# Allegro board PCB_backup.brd
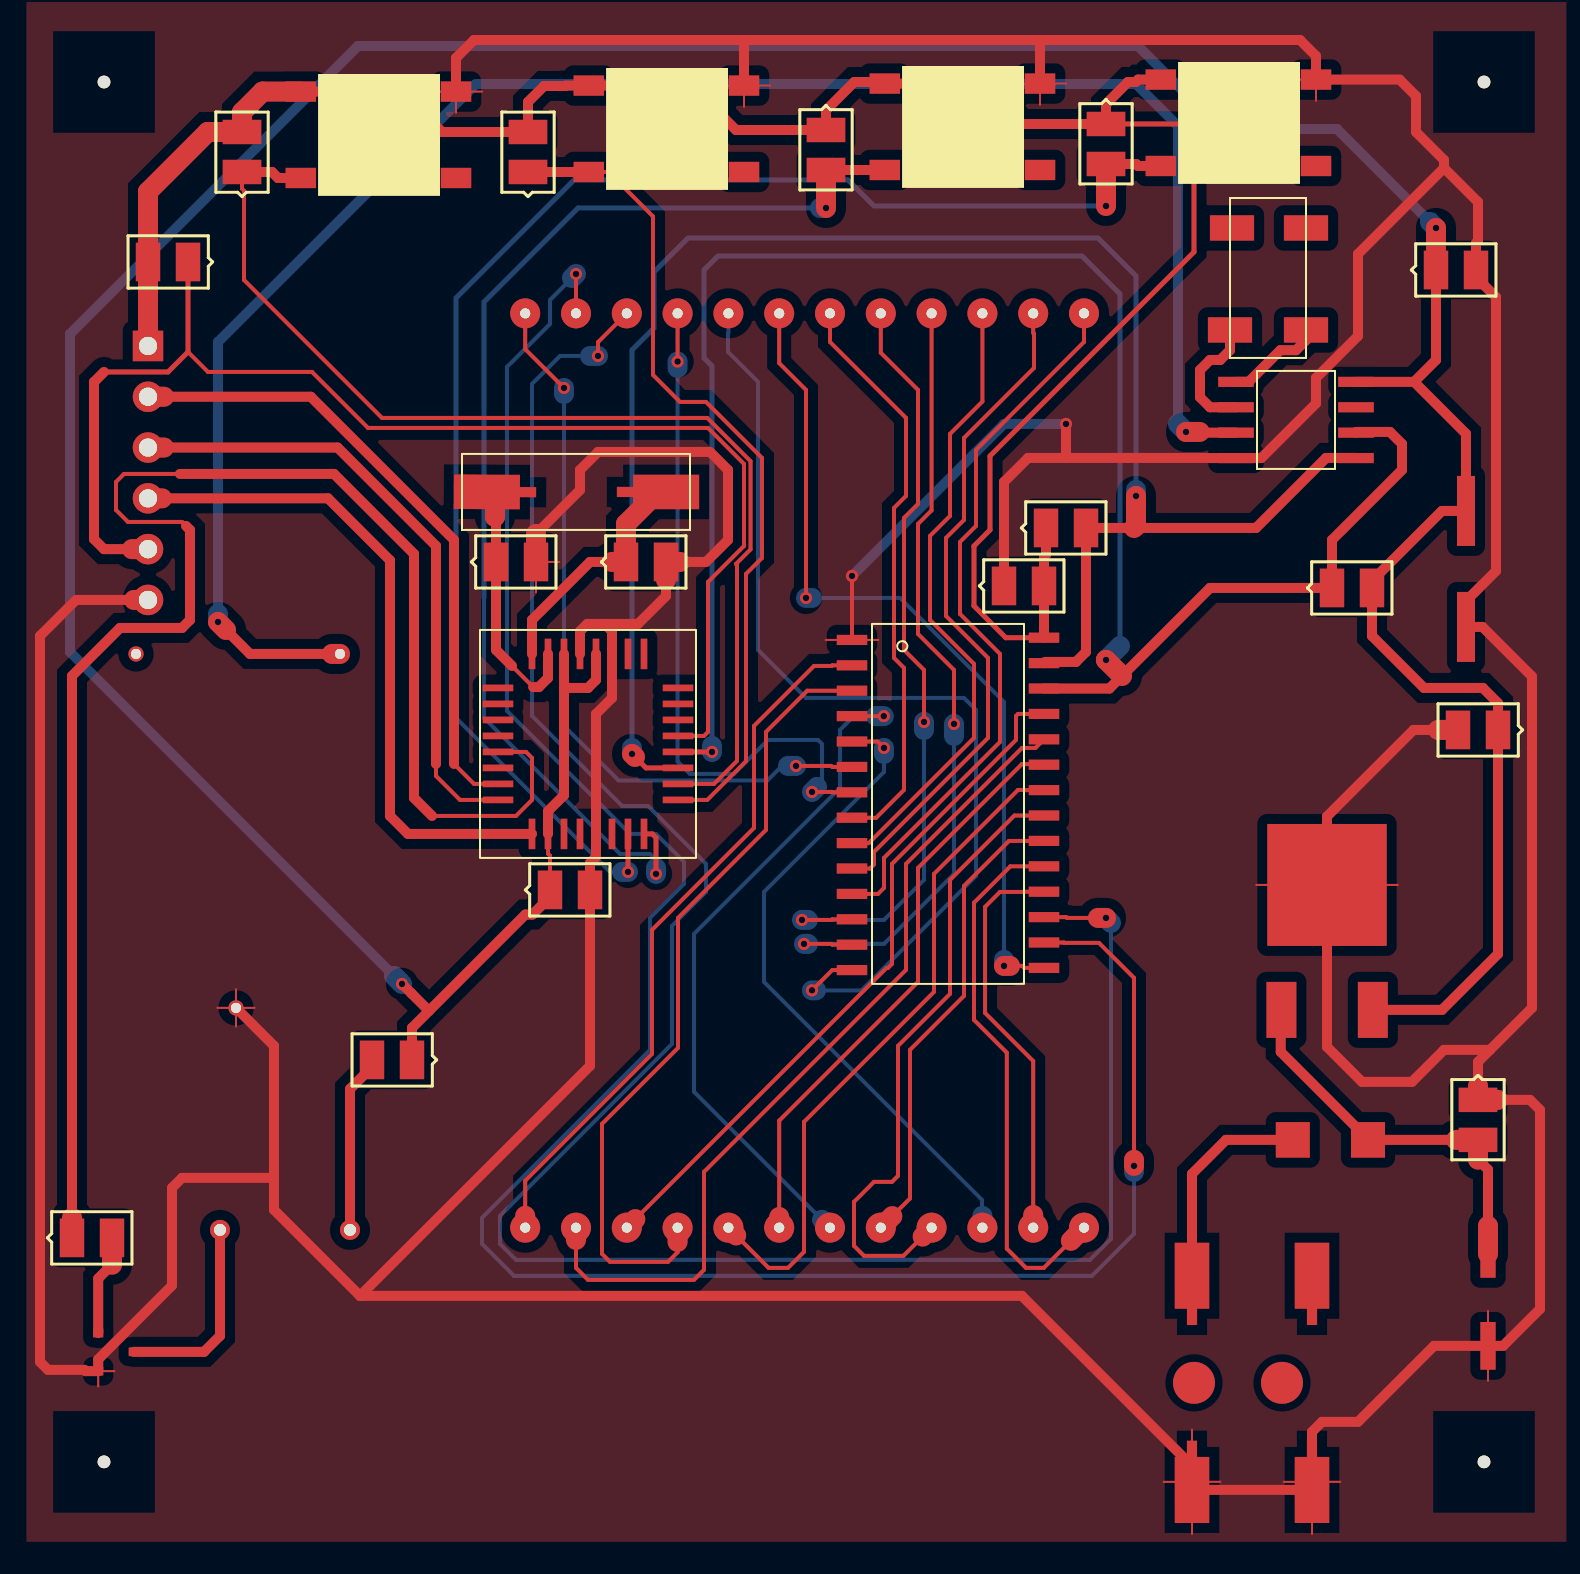
[diagram p0: board, top side]
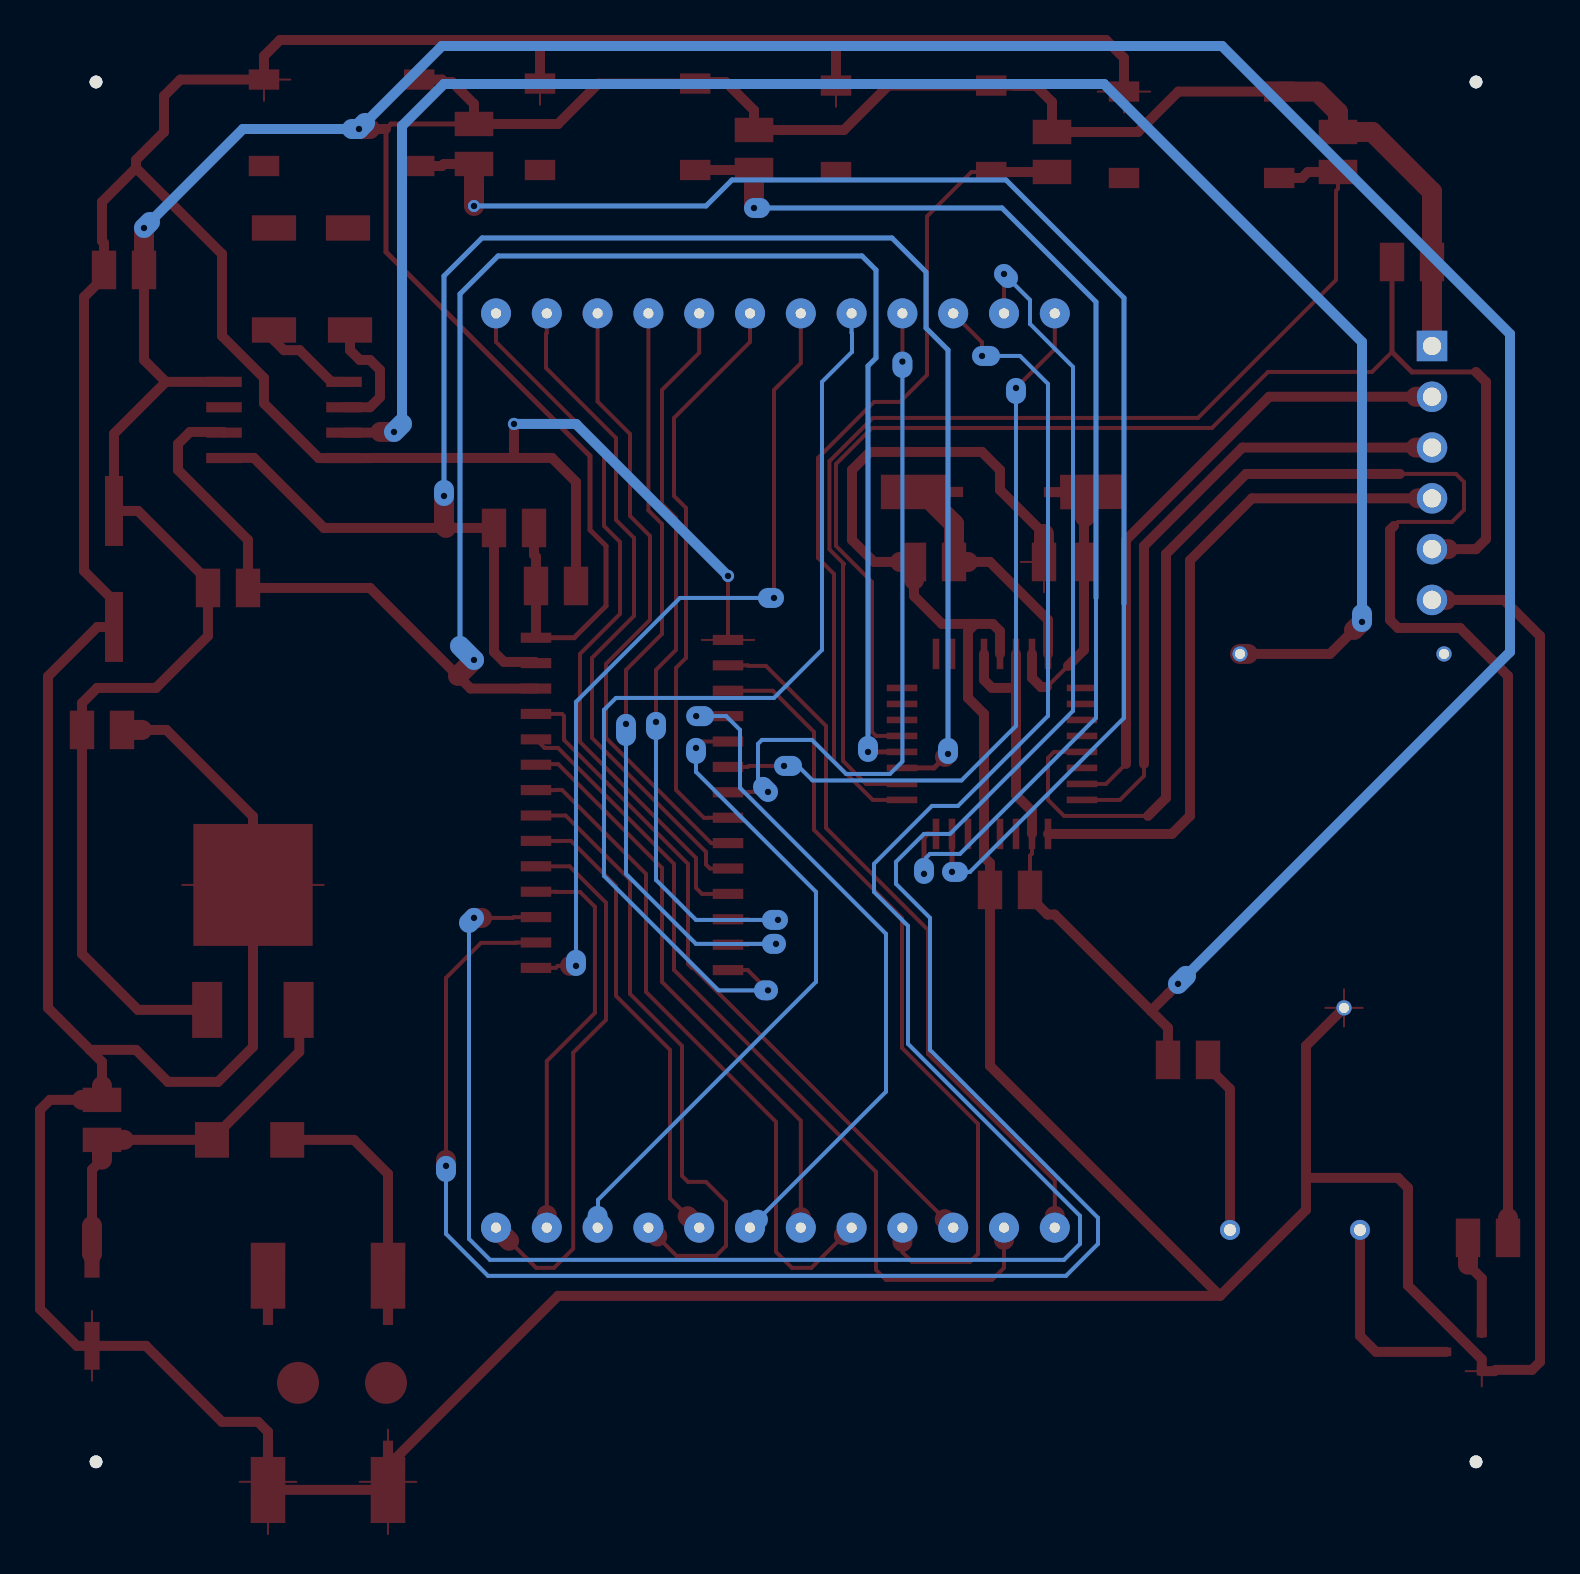
[diagram p1: board, bottom side, seen from below]

No outline. copper layers: TOP, BOTTOM. Coordinates in mm from the lowest, leftmost part position.

## Design rules (mm)
constraint set DEFAULT: min track width 0.1

## Placement (name value [footprint] x y rotation side)
BT1  Battery  [BATCR2032VTM]  8.2 30.3 270 top
C1  100n  [SMD0805]  46.6 43.8 0 top
C2  100n  [SMD0805]  68.2 59.6 0 top
C3  100n  [SMD0805]  70.3 18.1 270 top
C4  100n  [SMD0805]  71.3 36.6 180 top
C5  100n  [SMD0805]  23.9 28.6 0 top
C6  22p  [SMD0805]  27.7 45 0 top
C7  22p  [SMD0805]  21.2 45 0 top
C8  100u  [CE100-16SMD]  70.8 8 0 top
C9  220u  [UWT0J221MCL6GS]  69.7 44.6 0 top
D1  -  [TBA23-12SURKCGKWA]  50.6 7.9 180 bottom
D2  S1M  [DO214AC]  63 16.1 180 top
J1  CON6  [JUMPER6]  3.8 49.4 270 top
J2  PC-GK2.1/SMD  [PCGK21SMD]  59.9 6 0 top
LS1  -  [LD-BZEN-1205]  10.3 11.6 270 top
MODE  TACTM-67N-F-1  [TACT67N]  18.4 69.4 180 top
NOREF  -  [unnamed]  70.6 69 0 top
NOREF#2  -  [unnamed]  1.6 0 0 top
NOREF#3  -  [unnamed]  1.6 69 0 top
NOREF#4  -  [unnamed]  70.6 0 0 top
Q1  BC817-40L  [SOT23]  2.2 5.5 0 top
R1  4k7  [SMD0805]  0 11.2 0 top
R2  4k7  [SMD0805]  51.7 66.9 270 top
R3  4k7  [SMD0805]  22.8 64.5 90 top
R4  4k7  [SMD0805]  8.5 64.5 90 top
R5  4k7  [SMD0805]  37.7 66.6 270 top
R6  4k7  [SMD0805]  5.8 60 180 top
R7  4k7  [SMD0805]  63 43.7 0 top
R8  4k7  [SMD0805]  48.7 46.7 0 top
R9  100R  [SMD0805]  17 20.1 180 top
SET  TACTM-67N-F-2  [TACT67N]  32.8 69.7 180 top
U1  HT16K33-28SOP  [SOP28]  43.8 29.1 0 top
U2  ATmega8-TQ32  [TQFP32]  25.8 35.9 270 top
U3  DS1307  [SO8]  61.2 52.1 0 top
U4  L78M05ACDT  [DPAK]  62.8 29.1 0 top
UNK+  TACTM-67N-F-3  [TACT67N]  47.6 69.8 180 top
UNK-  TACTM-67N-F-4  [TACT67N]  61.4 70 180 top
Y1  12.00M-SMDHC49S  [SMDHC49S]  25.2 48.5 0 top
Y2  ABS25-32.768KHZ  [ABS25KRYSTAL]  59.8 59.2 180 top

## Library data of the parts
BT1 = Battery_4
C1-C7 = CAP NP
C8 C9 = CAP POL
D1 = TBA23-12SURKCGKWA_1
D2 = DIODE
J1 = CON6_0
J2 = PC-GK2_1.1/SMD
LS1 = LD-BZEN-1205_0
MODE SET UNK+ UNK- = TACTM-67N-F_2
Q1 = BC817-40L_0
R1-R9 = R
U1 = HT16K33-28SOP_2
U2 = ATmega8-TQ32_5
U3 = DS1307_1
U4 = L78M05ACDT_1
Y1 = 492S/SM_2
Y2 = ABS25-32_0.768KHZ

## Footprints (pads in the part's own frame, mm; a bottom-side part is the same pattern mirrored in y, then rotated)
ABS25KRYSTAL
  rect 2.21x1.27 smd: 1(-1.9,2.6) 2(-1.9,-2.5) 3(1.8,-2.5) 4(1.9,2.6)
BATCR2032VTM
  round 0.762 hole 0.508: 1(-10.1,5.2) 2(-10.1,-5) 3(7.6,0)
CE100-16SMD
  rect 0.762x2.388 smd: 1(0,2.4) 2(0,-2.2)
DO214AC
  rect 1.702x1.778 smd: 1(-1.8,0) 2(1.96,0)
DPAK
  rect 1.5x2.8 smd: 1(-2.33,-6.5) 2(2.242,-6.5)
  rect 5.969x6.096 smd: 3(-0.05,-0.25)
JUMPER6
  rect 1.524x1.524 hole 0.914: 1(-6.4,0)
  round 1.524 hole 0.914: 2(-3.86,0) 3(-1.32,0) 4(1.22,0) 5(3.76,0) 6(6.3,0)
LD-BZEN-1205
  round 1 hole 0.6: 1(0,3.6) 2(0,-2.9)
PCGK21SMD
  round 2.1 smd: (-3.8,-2.05) (0.6,-2.05)
  custom 1.727x4.115 smd: 1(-3.9,2.9) 2(2.1,2.9) 3(-3.9,-7) 4(2.1,-7)
SMD0805
  rect 1.219x1.93 smd: 1(0,0) 2(2,0)
SMDHC49S
  custom 4.115x1.727 smd: 1(4.1,0)
  custom 4.115x1.727 smd rot 179.6: 2(-4.05,0)
SO8
  rect 1.778x0.508 smd: 1(-3,1.905) 2(-3,0.635) 3(-3,-0.635) 4(-3,-1.905) 5(3,-1.905) 6(3,-0.635) 7(3,0.635) 8(3,1.905)
SOP28
  rect 1.524x0.508 smd: 1(-4.8,12) 2(-4.8,10.73) 3(-4.8,9.46) 4(-4.8,8.19) 5(-4.8,6.92) 6(-4.8,5.65) 7(-4.8,4.38) 8(-4.8,3.11) 9(-4.8,1.84) 10(-4.8,0.57) 11(-4.8,-0.7) 12(-4.8,-1.97) 13(-4.8,-3.24) 14(-4.8,-4.51) 15(4.8,-4.4) 16(4.8,-3.13) 17(4.8,-1.86) 18(4.8,-0.59) 19(4.8,0.68) 20(4.8,1.95) 21(4.8,3.22) 22(4.8,4.49) 23(4.8,5.76) 24(4.8,7.03) 25(4.8,8.3) 26(4.8,9.57) 27(4.8,10.84) 28(4.8,12.11)
SOT23
  rect 0.508x0.432 smd: 1(-0.889,0.94) 2(-0.889,-0.965) 3(0.889,0)
TACT67N
  rect 1.524x1.016 smd: 1(6.96,5.2) 2(6.96,0.88) 3(-0.8,5.2) 4(-0.8,0.88)
TBA23-12SURKCGKWA
  round 1.5 hole 0.508: 1(0,3.81) 2(2.54,3.81) 3(5.08,3.81) 4(7.62,3.81) 5(10.16,3.81) 6(12.7,3.81) 7(15.24,3.81) 8(17.78,3.81) 9(20.32,3.81) 10(22.86,3.81) 11(25.4,3.81) 12(27.94,3.81) 13(27.94,49.53) 14(25.4,49.53) 15(22.86,49.53) 16(20.32,49.53) 17(17.78,49.53) 18(15.24,49.53) 19(12.7,49.53) 20(10.16,49.53) 21(7.62,49.53) 22(5.08,49.53) 23(2.54,49.53) 24(0,49.53)
TQFP32
  rect 1.524x0.33 smd: 1(-4.5,2.8) 2(-4.5,2) 3(-4.5,1.2) 4(-4.5,0.4) 5(-4.5,-0.4) 6(-4.5,-1.2) 7(-4.5,-2) 8(-4.5,-2.8) 17(4.5,-2.8) 18(4.5,-2) 19(4.5,-1.2) 20(4.5,-0.4) 21(4.5,0.4) 22(4.5,1.2) 23(4.5,2) 24(4.5,2.8)
  rect 0.33x1.524 smd: 9(-2.8,-4.5) 10(-2,-4.5) 11(-1.2,-4.5) 12(-0.4,-4.5) 13(0.4,-4.5) 14(1.2,-4.5) 15(2,-4.5) 16(2.8,-4.5) 25(2.8,4.5) 26(2,4.5) 27(1.2,4.5) 28(0.4,4.5) 29(-0.4,4.5) 30(-1.2,4.5) 31(-2,4.5) 32(-2.8,4.5)
unnamed
  round 0.635 hole 3.175 unplated: (0,0)
UWT0J221MCL6GS
  rect 0.9x3.5 smd: 1(0,2.95) 2(0,-2.85)

## Nets
GND_SIGNAL: BT1.3(-) C1.1 C2.2 C3.1 C4.2 C5.2 C6.2 C7.2 C8.2 C9.2 J1.6 J2.3 J2.4 MODE.4 Q1.2(EMITTER) SET.4 U1.1(VSS) U2.3 U2.5 U2.21 U3.4 U4.3 UNK+.4 UNK-.4
+: BT1.2
N02068: J1.2 U2.15
N02083: J1.4 U2.17
N02208: D1.5 U1.20
N02210: D1.15 U1.17
N02212: D1.4 U1.21
N02214: D1.2 U1.18
N02216: D1.8 U1.22
N02218: D1.18 U1.15
N02220: D1.1 U1.19
N02222: D1.7 U1.23
N02224: D1.14 U1.16
N02226: D1.11 U1.24
N02228: D1.10 U1.25
N02362: D1.17 U1.14
N02378: D1.21 U1.13
N02401: D1.20 U1.12
N02499: D1.24 U1.11
N02611: D1.23 U1.10
N03217: D1.22 U1.9
N03241: D1.19 U1.8
N03266: D1.16 U1.7
N03291: D1.13 U1.6
N03316: D1.3 U1.5
N03341: D1.6 U1.4
N03367: D1.9 U1.3
N03392: D1.12 U1.2
N04189: R8.2 U1.27 U2.27 U3.5
N04289: R7.1 U1.26 U2.28 U3.6
N04939: BT1.1 U3.3
N06025: C1.2 C2.1 C4.1 C5.1 C9.1 J1.1 MODE.2 R2.1 R3.2 R4.2 R5.1 R6.2 R7.2 R8.1 R9.1 SET.2 U1.28 U2.4 U2.6(VCC#6) U2.18 U3.8 U4.2(OUTPUT) UNK+.2 UNK-.2
N06344: C3.2 C8.1 D2.1(K) U4.1
N08059: R2.2 U2.23 UNK-.1
N08379: R5.2 U2.24 UNK+.1
N010431: LS1.1 R9.2
N10447: C6.1 U2.8 Y1.1
N10454: C7.1 U2.7 Y1.2(OUT)
N11300: J1.5 R6.1 U2.29
N14311: D2.2 J2.1
N24135: R3.1 SET.1 U2.25
N24605: MODE.1 R4.1 U2.26
N28869: R1.1 U2.13
N29351: J1.3 U2.16
N31755: Q1.1 R1.2
N44408: U3.1 Y2.1
N44420: U3.2(X2) Y2.4
N057671: LS1.2(-) Q1.3

Pads without a net: J2 2; MODE 3; SET 3; U2 1 2 9 10 11 12 14 19 20 22 30 31 32; U3 7; UNK+ 3; UNK- 3; Y2 2 3

## Via types
v1: diameter 0.61, hole 0.33, TOP to BOTTOM, 32 vias

## Routing (per net, layer and track width the routed paths; a pad name or vN(x,y) marks a point on that pad's centre or on a via; arc(x,y) is an arc through that point)
GND_SIGNAL: length 476.2
  TOP w0.1: 40.31,41.1 U1.1 37.69,41.1 ; J2.3 57.41,-1 ; J2.3 56,-3.61 ; J2.3 54.59,-1 ; J2.3 56,1.61 ; 24.36,45 C7.2 23.2,43.48 ; UNK+.4 49.71,68.92 ; UNK+.4 48.4,67.86 ; UNK+.4 47.09,68.92 ; 33.6,67.76 SET.4 ; SET.4 34.91,68.82 ; SET.4 32.29,68.82 ; 62,1.61 J2.4 ; J2.4 60.59,-1 ; J2.4 63.41,-1 ; J2.4 62,-3.61 ; BT1.3 8.2,23.63 ; BT1.3 7.27,22.7 ; BT1.3 9.13,22.7 ; BT1.3 8.2,21.77 ; 66.29,28.85 U4.3 59.21,28.85 ; 70.8,7.55 C8.2 70.8,4.06 ; MODE.4 20.51,68.52 ; MODE.4 19.2,67.46 ; MODE.4 17.89,68.52 ; 60.89,69.12 UNK-.4 62.2,68.06 ; 2.12,4.53 Q1.2 1.31,3.77
  TOP w0.2: U1.1 v1(39,44.3)
  TOP w0.5: 68.3,36.6 67.07,36.6 62.75,32.28 U4.3 62.75,20.75 64.5,19 67,19 68.6,20.6 70.9,20.6 ; 14.4,8.3 25.9,19.8 C5.2 25.9,29.94 26.2,30.24 U2.21 26.2,37.4 27,38.2 U2.3 27,41.54 26.64,41.9 ; 14.4,8.3 47.49,8.3 56,-0.21 J2.3 56,-1.4 62,-1.4 J2.4 62,1.5 62.5,2 64.3,2 68.1,5.8 C8.2 71.56,5.8 73.4,7.64 73.4,17.6 72.9,18.1 71.3,18.1 ; 14.4,8.3 10.1,12.6 10.1,14.3 ; 49.7,50.2 47.8,50.2 46.6,49 C1.1 ; 49.7,50.2 v1(49.7,51.9) ; 49.7,50.2 56.81,50.2 56.81,50.19 U3.4 59.47,50.19 62.2,52.93 62.2,54.2 64.3,56.3 64.3,60.4 68.6,64.7 ; SET.4 33.6,71 33.5,71.1 ; BT1.3 10.1,20.8 10.1,14.3 ; 33.5,71.1 20.1,71.1 19.2,70.2 MODE.4 ; 33.5,71.1 48.43,71.1 ; 10.1,14.3 10,14.2 5.5,14.2 5,13.7 5,8.82 1.31,5.13 Q1.2 0.68,4.53 0.61,4.6 -1.2,4.6 -1.6,5 -1.6,41.3 0.2,43.1 3.1,43.1 ; 70.9,20.6 70.3,20 70.3,18.8 ; 70.9,20.6 73,22.7 73,39.28 70.53,41.75 C9.2 69.7,43.05 71.2,44.55 71.2,58.24 70.2,59.24 C2.2 70.2,60.94 70.3,61.04 70.3,63 68.6,64.7 ; UNK+.4 48.4,71.07 48.43,71.1 ; 26.64,41.9 25.76,41.9 25.4,41.54 U2.5 ; 26.64,41.9 28.3,41.9 29.7,43.3 29.7,44.1 ; 68.6,64.7 68.6,65.1 67.2,66.5 67.2,68.3 66.38,69.12 UNK-.4 62.2,70.3 61.4,71.1 48.43,71.1 ; 23.2,46.4 25.4,48.6 25.4,49.6 26.3,50.5 31.9,50.5 32.8,49.6 32.8,46.1 31.7,45 30.4,45
  TOP w1: 29.7,44.1 C6.2 30.4,45 ; 68.3,36.6 C4.2 ; 70.3,18.8 C3.1 71.3,18.1 ; 23.2,46.4 C7.2 ; 3.1,43.1 J1.6
  BOTTOM w0.5: v1(49.7,51.9) 46.6,51.9 v1(39,44.3)
N02068: length 32.1
  TOP w0.2: 19.1,34.9 20.1,33.9 U2.15
  TOP w0.5: 19.1,34.9 19.1,46.1 11.94,53.26 4.6,53.26
  TOP w1: J1.2 4.6,53.26
N02083: length 33.6
  TOP w0.5: U2.17 16.8,31.4 15.9,32.3 15.9,45.08 12.8,48.18 4.5,48.18
  TOP w1: J1.4 4.5,48.18
N02208: length 23.7
  TOP w0.2: 41.01,12.28 41.9,13.17 41.9,20.6 44.6,23.3 44.6,28.8 46.85,31.05 U1.20
  TOP w1: D1.5 41.01,12.28
N02210: length 108.8
  TOP w0.2: 51.3,27.2 49.75,27.2 49.71,27.24 U1.17 ; D1.15 26.3,55.99 v1(26.3,55.3)
  TOP w1: v1(51.7,27.2) 51.3,27.2
  BOTTOM w0.2: 25.9,55.3 24.4,55.3 23,53.9 23,37.3 27.5,32.8 28.8,32.8 31.7,29.9 31.7,28.5 30,26.8 30,20.9 21.4,12.3 21.4,10.9 22.2,10.1 50.9,10.1 51.95,11.15 51.95,26.95
  BOTTOM w1: v1(51.7,27.2) 51.95,26.95 ; 25.9,55.3 v1(26.3,55.3)
N02212: length 31.5
  TOP w0.2: 42.54,11.27 41.57,10.3 39.6,10.3 39.1,10.8 39.1,13 40.1,14 41,14 41.3,14.3 41.3,20.8 43.9,23.4 43.9,29.1 47.12,32.32 U1.21
  TOP w1: D1.4 42.54,11.27
N02214: length 20.3
  TOP w0.2: U1.18 47.61,28.51 47.6,28.5 46.4,28.5 45.65,27.75 45.65,22.45 48.06,20.04 48.06,12.34
  TOP w1: D1.2 48.06,12.34
N02216: length 33.8
  TOP w0.2: 33.21,11.32 34.83,9.7 35.8,9.7 36.6,10.5 36.6,17 43.1,23.5 43.1,29.4 47.3,33.6 47.6,33.6 47.61,33.59 U1.22
  TOP w1: D1.8 33.21,11.32
N02218: length 42.1
  TOP w0.2: U1.15 47.61,24.7 47.51,24.8 46.9,24.8 ; v1(36.7,43.2) 36.7,53.6 35.36,54.94 D1.18
  TOP w1: v1(46.6,24.8) 46.9,24.8
  BOTTOM w0.2: 37,43.2 41.4,43.2 46.6,38 46.6,25.1
  BOTTOM w1: v1(46.6,24.8) 46.6,25.1 ; 37,43.2 v1(36.7,43.2)
N02220: length 27.3
  TOP w0.2: 49.94,11.06 48.59,9.7 47.7,9.7 46.74,10.66 46.74,20.46 45.1,22.1 45.1,27.96 46.92,29.78 U1.19
  TOP w1: D1.1 49.94,11.06
N02222: length 29.3
  TOP w0.2: U1.23 48.57,34.89 47.49,34.89 42.3,29.7 42.3,24 35.36,17.06 35.36,12.24
  TOP w1: D1.7 35.36,12.24
N02224: length 112.7
  TOP w0.2: U1.16 49.59,25.97 49.61,25.95 51.35,25.95 53.1,24.2 53.1,15.1 ; D1.14 v1(25.2,59.4)
  TOP w1: v1(53.1,14.8) 53.1,15.1
  BOTTOM w0.2: 53.1,14.5 53.1,11.4 51,9.3 22.1,9.3 20.5,10.9 20.5,12.2 28.9,20.6 28.9,27.2 30.6,28.9 30.6,30 29.2,31.4 27.9,31.4 21.75,37.55 21.75,54.75 23.9,56.9 23.9,58.1 25,59.2
  BOTTOM w1: 25,59.2 v1(25.2,59.4) ; v1(53.1,14.8) 53.1,14.5
N02226: length 43.3
  TOP w0.2: 25.2,11.1 25.2,9.7 25.8,9.1 31.1,9.1 31.6,9.6 31.6,14.5 41.7,24.6 41.7,29.9 47.5,35.7 48.17,35.7 U1.24 48.09,36.13
  TOP w1: D1.11 25.2,11.1
N02228: length 35.1
  TOP w0.2: 28.16,12.13 40.73,24.7 40.8,24.7 41,24.9 41,29.9 47.2,36.1 47.2,37.3 47.3,37.4 U1.25
  TOP w1: D1.10 28.16,12.13
N02362: length 50.9
  TOP w0.2: U1.14 38.01,24.59 v1(37,23.58)
  BOTTOM w0.2: D1.17 32.82,56.45 32.8,56.43 32.8,55.5 34.3,54 34.3,40.6 36.7,38.2 44.6,38.2 45.2,37.6 45.2,29.3 39.48,23.58 37.2,23.58
  BOTTOM w1: v1(37,23.58) 37.2,23.58
N02378: length 40.4
  TOP w0.2: v1(44.1,36.9) 44.1,39.6 42.3,41.4 42.3,46.9 42.98,47.58 D1.21 ; v1(36.6,25.9) 37.97,25.9 38.01,25.86 U1.13
  BOTTOM w0.2: 36.8,25.9 40.6,25.9 44.1,29.4 44.1,36.3
  BOTTOM w1: v1(44.1,36.9) 44.1,36.3 ; 36.8,25.9 v1(36.6,25.9)
N02401: length 39.2
  TOP w0.2: v1(42.6,37) 42.6,39.6 41.6,40.6 41.6,47.2 42.3,47.9 42.3,53.6 40.44,55.46 D1.20 ; U1.12 38.01,27.13 37.98,27.1 v1(36.5,27.1)
  BOTTOM w0.2: 36.8,27.1 40.6,27.1 42.6,29.1 42.6,36.6
  BOTTOM w1: v1(42.6,37) 42.6,36.6 ; 36.8,27.1 v1(36.5,27.1)
N02499: length 36.3
  TOP w0.2: D1.24 50.6,56 45.2,50.6 45.2,46.8 44.4,46 44.4,42.4 46.4,40.4 46.4,36 40.6,30.2 40.6,28.7 40.3,28.4 U1.11
N02611: length 33.8
  TOP w0.2: D1.23 48.06,56.45 48.1,56.41 48.1,54.7 44.6,51.2 44.6,47.1 43.7,46.2 43.7,42.3 45.8,40.2 45.8,36.2 40.1,30.5 40.1,29.87 39.9,29.67 U1.10
N03217: length 31.5
  TOP w0.2: D1.22 45.52,53.02 43.9,51.4 43.9,47.3 42.9,46.3 42.9,42.1 45.1,39.9 45.1,36.2 39.84,30.94 U1.9
N03241: length 29
  TOP w0.2: U1.8 39.99,32.21 40,32.2 40.2,32.2 41.6,33.6 41.6,39.7 41.1,40.2 41.1,47.7 41.7,48.3 41.7,52.2 37.9,56 D1.19
N03266: length 35.3
  TOP w0.2: D1.16 v1(30.28,55.02) ; U1.7 38.01,33.48 37.99,33.5 v1(37,33.5)
  BOTTOM w0.2: 37.25,33.75 37.5,34 37.5,35.9 37.3,36.1 34.8,36.1 33.1,34.4 30.9,34.4 30.28,35.02 30.28,54.7
  BOTTOM w1: v1(37,33.5) 37.25,33.75 ; 30.28,54.7 v1(30.28,55.02)
N03291: length 37.3
  TOP w0.2: U1.6 38.01,34.75 37.96,34.8 v1(36.2,34.8) ; D1.13 22.66,55.64 v1(24.6,53.7)
  BOTTOM w0.2: 35.8,34.8 35.5,34.8 34.77,34.07 27.33,34.07 24.6,36.8 24.6,53.4
  BOTTOM w1: 24.6,53.4 v1(24.6,53.7) ; v1(36.2,34.8) 35.8,34.8
N03316: length 32.7
  TOP w0.2: v1(40.6,35.7) 40.28,36.02 U1.5
  BOTTOM w0.2: 45.52,12.3 45.52,12.69 45.5,12.71 45.5,13.1 34.6,24 34.6,28.5 40.6,34.5 40.6,35.4
  BOTTOM w1: 45.52,12.3 D1.3 ; v1(40.6,35.7) 40.6,35.4
N03341: length 34.8
  TOP w0.2: U1.4 v1(40.59,37.29)
  BOTTOM w0.2: 37.5,12.11 31.1,18.51 31.1,26.4 38.4,33.7 38.4,36.6 39.09,37.29 40.2,37.29
  BOTTOM w1: 37.5,12.11 D1.6 ; v1(40.59,37.29) 40.2,37.29
N03367: length 40
  TOP w0.2: 30.28,11 30.28,10.48 29.8,10 26.9,10 26.5,10.4 26.5,16.9 30.3,20.7 30.3,27.2 34.7,31.6 34.7,36.5 36.76,38.56 U1.3
  TOP w1: D1.9 30.28,11
N03392: length 36
  TOP w0.2: U1.2 38.01,39.83 37.98,39.8 37.1,39.8 34.1,36.8 34.1,31.7 29,26.6 29,20.4 22.66,14.06 22.66,12.3
  TOP w1: D1.12 22.66,12.3
N04189: length 88.9
  TOP w0.25: U2.27 28.7,34.7 28.15,35.25
  TOP w0.5: U3.5 64.19,50.2 62.7,50.2 59.2,46.7 R8.2 50.7,40.5 50.2,40 48.66,40 U1.27
  TOP w1: 53.1,46.7 53.2,46.8 v1(53.2,48.3) ; v1(28,35.4) 28.15,35.25
  BOTTOM w0.25: 53.2,48.6 53.2,59.3 51.3,61.2 30.8,61.2 29.1,59.5 29.1,56.7 28,55.6 28,35.7
  BOTTOM w1: v1(53.2,48.3) 53.2,48.6 ; 28,35.7 v1(28,35.4)
N04289: length 95.3
  TOP w0.25: U2.28 v1(32,35.5)
  TOP w0.5: U1.26 51.87,38.67 56.9,43.7 R7.1 63,46.1 66.5,49.6 66.5,50.9 65.9,51.5 64.23,51.5 U3.6
  TOP w1: v1(51.7,40.1) 52.5,39.3
  BOTTOM w0.25: 52.4,40.8 52.4,58.4 50.5,60.3 32.3,60.3 31.6,59.6 31.6,55.2 32,54.8 32,35.8
  BOTTOM w1: 52.4,40.8 v1(51.7,40.1) ; v1(32,35.5) 32,35.8
N04939: length 93
  TOP w0.5: 56.38,51.5 56.42,51.47 U3.3 ; 7.7,41.6 8.9,40.4 13,40.4
  TOP w1: 7.7,41.6 v1(7.3,42) ; v1(55.7,51.5) 56.38,51.5 ; BT1.1 13,40.4
  BOTTOM w0.5: 7.3,42.4 7.3,56 20.2,68.9 53.2,68.9 55.3,66.8 55.3,51.9
  BOTTOM w1: 55.3,51.9 v1(55.7,51.5) ; v1(7.3,42) 7.3,42.4
N06025: length 313.8
  TOP w0.2: C5.1 23.9,30.31 23.8,30.41 U2.18
  TOP w0.25: U1.28 46.69,41.21 45.1,42.8 45.1,45.8 45.9,46.6 45.9,50.3 56.1,60.5 56.1,66.65 55.85,66.9 R2.1
  TOP w0.5: U2.6 24.6,38.7 ; 24.6,38.7 25.8,38.7 26.2,39.1 U2.4 ; 24.6,38.7 24.6,33.34 23.8,32.54 U2.18 ; MODE.2 16.48,68.52 18.5,66.5 R3.2 22.8,68 23.6,68.8 24.68,68.8 24.7,68.82 SET.2 30.98,68.82 33.2,66.6 R5.1 37.7,67.59 39.11,69 40.56,69 UNK+.2 45.48,68.92 47.5,66.9 R2.1 51.7,67.9 52.8,69 53.18,69 53.3,69.12 UNK-.2 ; v1(16.5,23.9) 16.98,23.42 17.85,22.55 ; U1.28 C1.2 48.6,45.26 48.7,45.36 R8.1 ; 17.85,22.55 17,21.7 R9.1 ; 17.85,22.55 22.67,27.37 23.02,27.37 23.9,28.24 C5.1 ; 56.9,66.65 56.1,66.65 ; C2.1 68.2,55.1 67.1,54 ; 67.1,54 U3.8 ; 67.1,54 69.7,51.41 C9.1 68.49,47.55 65,44.06 R7.2 65,41.3 67.6,38.7 70.54,38.7 71.3,37.94 C4.1 71.3,25.4 68.5,22.6 U4.2
  TOP w1: J1.1 R6.2 3.8,63.52 6.78,66.5 R4.2 8.5,67.49 9.53,68.52 MODE.2 ; v1(57.45,66.65) 56.9,66.65 ; v1(68.2,61.7) C2.1
  BOTTOM w0.5: 67.9,62 63.25,66.65 57.8,66.65 ; 16.1,24.3 -0.1,40.5 -0.1,56.4 14.3,70.8 53.3,70.8 57.15,66.95
  BOTTOM w1: v1(16.5,23.9) 16.1,24.3 ; 57.15,66.95 v1(57.45,66.65) 57.8,66.65 ; 67.9,62 v1(68.2,61.7)
N06344: length 19.7
  TOP w0.5: 70.3,15.11 70.8,14.61 70.8,11.8 ; U4.1 60.44,22.57 60.44,20.5 64.8,16.14 D2.1 69.2,16.1
  TOP w1: 70.3,15.11 C3.2 69.2,16.1 ; 70.8,11.8 C8.1
N08059: length 75.1
  TOP w0.25: v1(27.8,29.5) U2.23
  TOP w0.5: R2.2 53.2,64.9 53.3,64.8 UNK-.1
  TOP w1: v1(51.7,62.8) R2.2
  BOTTOM w0.2: 19.2,42.9 19.2,37.2 26.9,29.5 27.5,29.5
  BOTTOM w0.25: 19.2,42.9 19.2,58.2 25.1,64.1 38.8,64.1 40.1,62.8 v1(51.7,62.8)
  BOTTOM w1: v1(27.8,29.5) 27.5,29.5
N08379: length 59.4
  TOP w0.25: U2.24 29.02,31.4 29.2,31.22 v1(29.2,29.4)
  TOP w0.5: R5.2 UNK+.1
  TOP w1: v1(37.7,62.7) R5.2
  BOTTOM w0.2: 20.6,43.2 20.6,37.2 27.4,30.4 28.9,30.4 29.1,30.2 29.1,30.03 29.2,29.93 29.2,29.7
  BOTTOM w0.25: 20.6,43.2 20.6,58 25.3,62.7 37.4,62.7
  BOTTOM w1: v1(29.2,29.4) 29.2,29.7 ; 37.4,62.7 v1(37.7,62.7)
N010431: length 9
  TOP w0.5: R9.2 15,19.74 13.9,18.64 LS1.1
N10447: length 11.8
  TOP w0.5: U2.8 23,42.1 25.9,45 27,45
  TOP w1: Y1.1 27.7,46.9 C6.1 27,45
N10454: length 12.7
  TOP w0.2: 22,39.8 23.06,38.74
  TOP w0.5: 23.06,38.74 23.34,38.74 23.8,39.2 U2.7 ; 21.14,47.26 21.2,47.2 C7.1 21.2,40.6 22,39.8
  TOP w1: 21.14,47.26 21.15,47.27 Y1.2
N11300: length 66.4
  TOP w0.2: U2.29 31.6,36.3 31.8,36.5 31.8,44 33.6,45.8 33.6,49.9 31.8,51.7 14.8,51.7 12,54.5 6.8,54.5 5.8,55.5
  TOP w0.25: R6.1 5.8,55.5 4.8,54.5 1.6,54.5
  TOP w0.5: 1.6,54.5 1.1,54 1.1,46.14 1.6,45.64 3,45.64
  TOP w1: J1.5 3,45.64
N14311: length 11.2
  TOP w0.5: D2.2 57.7,16.1 56,14.4 J2.1
N24135: length 42
  TOP w0.2: U2.25 31.76,33.1 33.7,35.04 33.7,44.4 34.5,45.2 34.5,50.2 31.7,53 30.4,53 29.05,54.35 29.05,62.28 26.83,64.5 SET.1
  TOP w0.5: R3.1 SET.1
N24605: length 56.3
  TOP w0.2: R4.1 8.5,63.66 8.6,63.56 8.6,59.1 15.5,52.2 31.76,52.2 33.93,50.04 33.93,45.63 33.2,44.9 33.25,44.85 33.25,35.05 32.1,33.9 U2.26
  TOP w0.5: R4.1 10,64.5 10.3,64.2 MODE.1
N28869: length 84.6
  TOP w0.2: U2.13 22.7,35.5 23,35.2 23,33.1 22.2,32.3 18,32.3 ; 5.4,49.4 2.6,49.4 2.2,49 2.2,47.6 2.8,47 5.5,47 5.7,46.8
  TOP w0.5: 5.4,49.4 13.1,49.4 17.1,45.4 17.1,33.2 18,32.3 ; 5.7,46.8 5.9,46.6 5.9,42.1 5.5,41.7 2.4,41.7 0,39.3 0,12.2
  TOP w1: R1.1 0,12.2
N29351: length 31.5
  TOP w0.2: 18.2,34.9 18.2,34.3 19.4,33.1 U2.16
  TOP w0.5: 4.6,50.72 13.28,50.72 18.2,45.8 18.2,34.9
  TOP w1: J1.3 4.6,50.72
N31755: length 5
  TOP w0.5: Q1.1 1.31,9.17 2,9.86
  TOP w1: R1.2 2,9.86
N44408: length 4.9
  TOP w0.5: Y2.1 61.7,56.09 61.2,55.59 60.42,55.59 58.84,54 U3.1
N44420: length 6.3
  TOP w0.5: Y2.4 57.9,55.59 57.41,55.1 56.9,55.1 56.4,54.6 56.4,53.24 56.9,52.74 58.2,52.74
N057671: length 9.9
  TOP w0.5: Q1.3 6.6,5.5 7.4,6.3 LS1.2

## Copper pours and planes (outline as drawn; the poured copper is in the pictures)
GND_SIGNAL on TOP: 74.72,-4 74.72,73 -2.28,73 -2.28,-4 ; 30 cut-outs
